# Altium PCB Glucometro_v2_PCB.PcbDoc
Units mm, origin at the board's own origin, x right, y up, seen from the top; angles counter-clockwise.
Board outline 92.46 x 57.91 mm, 2 copper layers (Top Layer, Bottom Layer), stack 0.325 mm thick; 17 components, 11 nets, 54 pads, 11 vias.
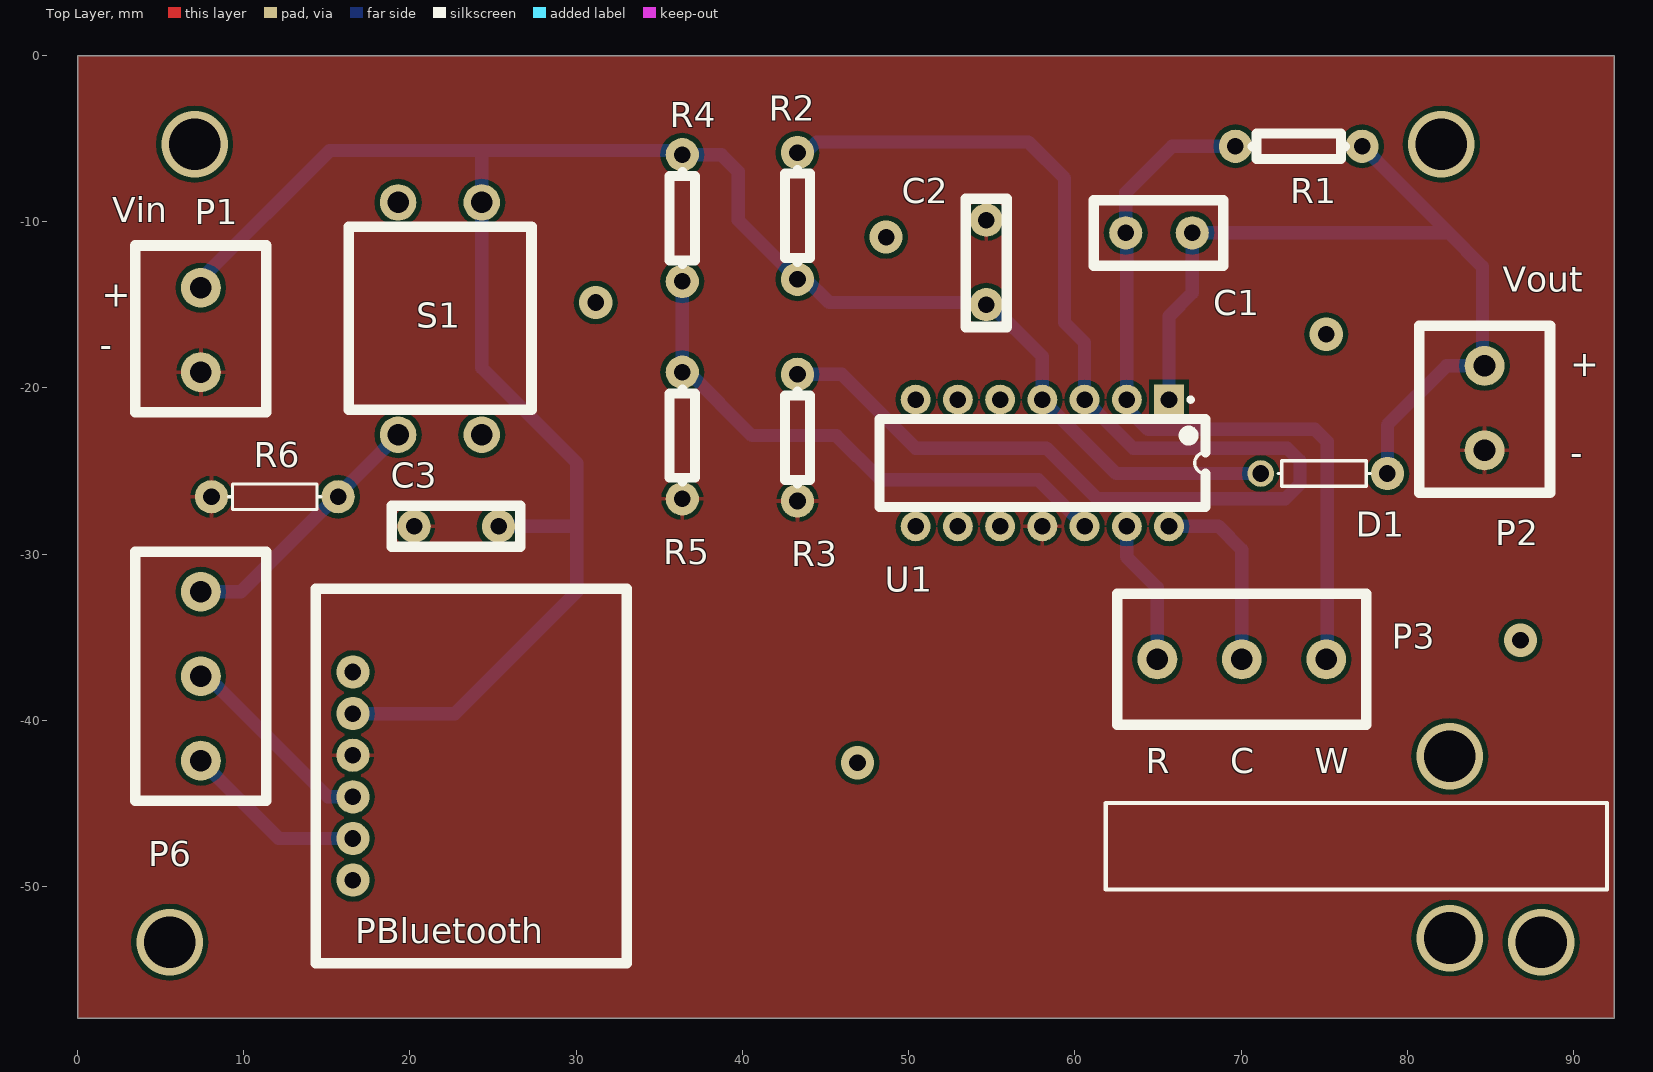
[diagram p0: Top Layer view]
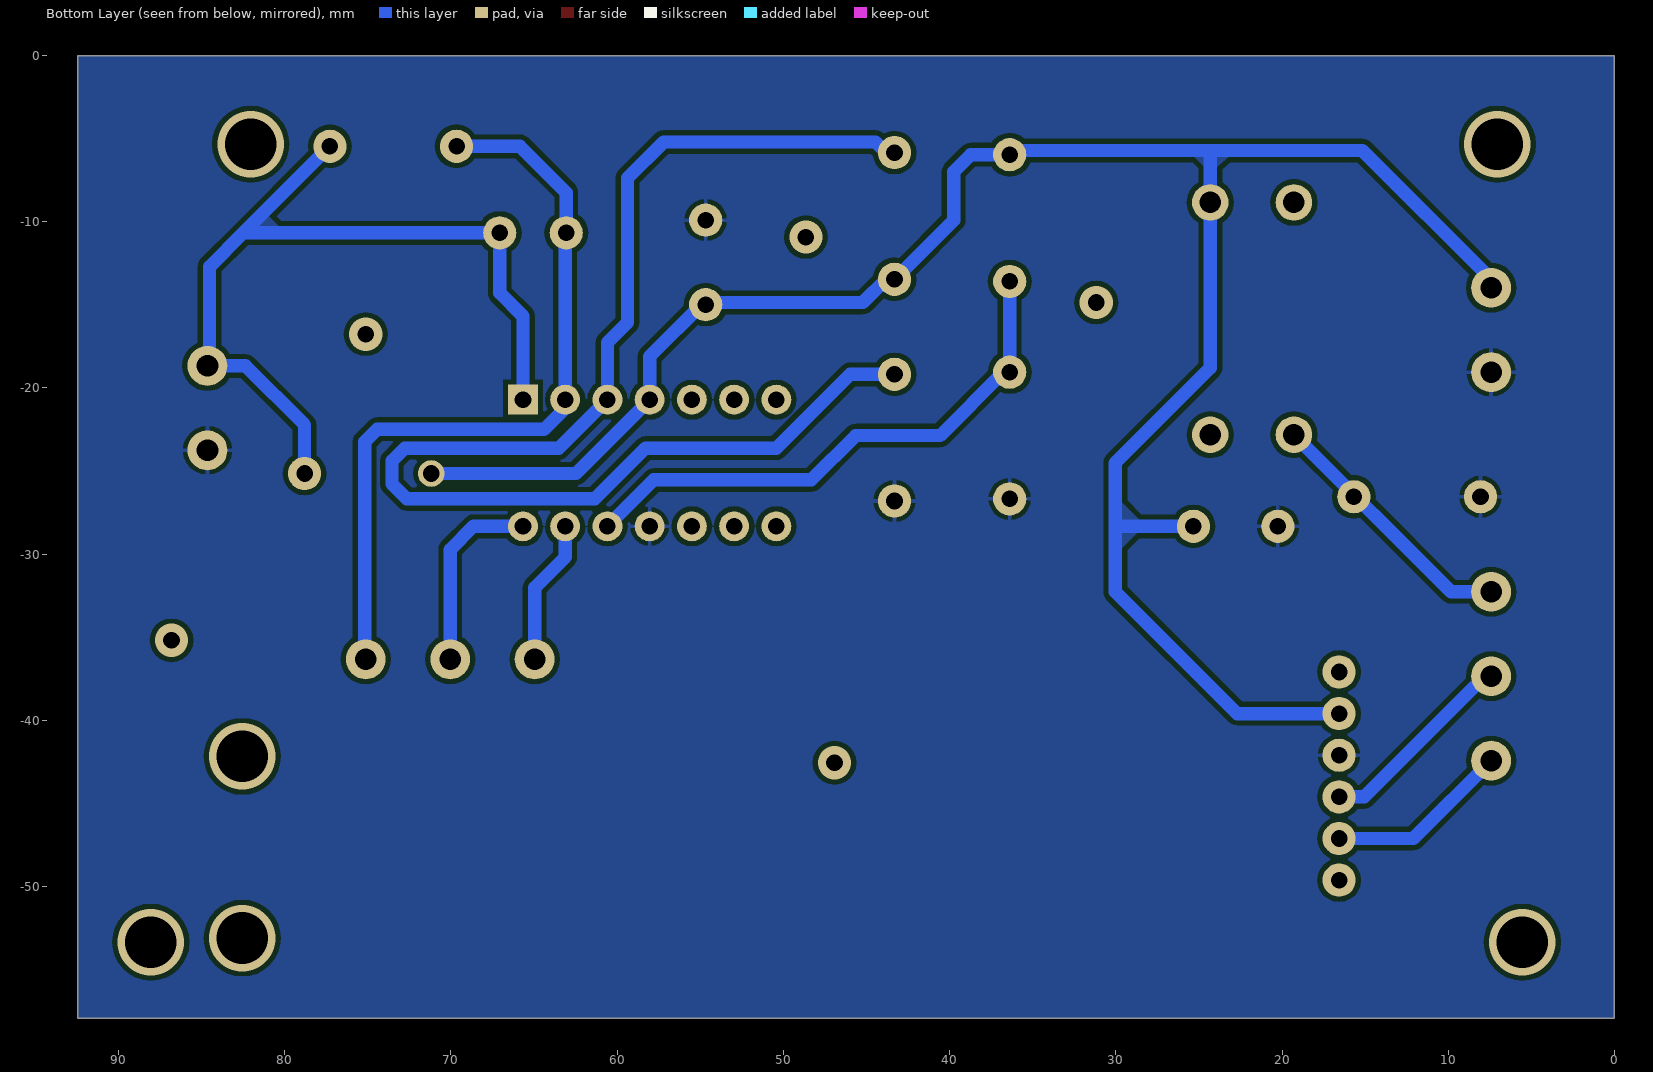
[diagram p1: Bottom Layer view, seen from below]

## Layer stack, top to bottom
Top Solder: solder mask 0.0102, Solder Resist, Dk 3.5
Top Layer: signal copper 0.0356
Dielectric 1: core 0.254, FR-4, Dk 4.2
Bottom Layer: signal copper 0.0356
Bottom Solder: solder mask 0.0102, Solder Resist, Dk 3.5

## Board outline
0,0 92.456,0 92.456,-57.912 0,-57.912

## Design rules (kind name [scope] priority, off if disabled: settings)
Clearance [All] p1: gap=0.3 ignorepadtopadclearanceinfootprint=FALSE
HoleSize [All] p1: absolutevalues=TRUE maxlimit=5 minlimit=0.025 maxpercent=80.000 minpercent=20.000
PlaneConnect [InNet('GND')] p1: pad.planeconnectstyle=Relief pad.reliefexpansion=0.3 pad.reliefentries=4 pad.reliefconductorwidth=0.3 pad.reliefairgap=0.3 via.planeconnectstyle=Direct via.reliefexpansion=0.508 via.reliefentries=4 via.reliefconductorwidth=0.254 via.reliefairgap=0.254
PolygonConnect [All] p1: connectstyle=Relief reliefconductorwidth=0.254 reliefentries=4 polygonreliefangle="90 Angle" airgapwidth=0.254
RoutingVias [All] p1: holewidth=0.711 width=1.27 viastyle="Through Hole" minholewidth=0.711 minwidth=1.27 maxholewidth=0.711 maxwidth=1.27
SilkToSilkClearance [All] p1: silktosilkclearance=0
SilkToSolderMaskClearance [IsPad] p1: minsilkscreentomaskgap=0 clearancetoexposedcopper=TRUE
SolderMaskExpansion [All] p1: expansion=0.102
Width [All] p1: maxlimit=0.9 minlimit=0.7 preferedwidth=0.8
26 further rules are at their usual default settings.

## Components (designator, comment, footprint, x,y, rotation, side; value= is the part's Value field where it differs from the comment)
C1 "Cap Modified" CAP_EDITED 63.056,-10.668 r0 top value=100nF
C2 "Cap" CAP_ALIM_EDITED 54.667,-9.906 r270 top value=100pF
C3 "Cap" CAP_ALIM_EDITED 25.33,-28.321 r180 top value=100pF
D1 "Diode" AXIAL-0.3#1 74.987,-25.146 r180 top
P1 "Header 2 Modified" Header2_edited 7.423,-19.05 r90 top
P2 "Header 2 Modified" Header2_edited 84.639,-18.669 r270 top
P3 "Header 3 Modified" HEADER3_EDITED 64.954,-36.322 r0 top
P6 "Header 3 Modified" HEADER3_EDITED 7.423,-32.258 r270 top
PBluetooth "Header 6" HEADERBLUETOOTH 16.567,-37.084 r270 top
R1 "Res1" AXIAL-0.3#2 73.463,-5.461 r0 top value=290K
R2 "Res1" AXIAL-0.3#2 43.307,-9.652 r270 top value=3.9K
R3 "Res1" AXIAL-0.3#2 43.307,-22.987 r90 top value=10K
R4 "Res1" AXIAL-0.3#2 36.379,-9.779 r90 top value=100K
R5 "Res1" AXIAL-0.3#2 36.379,-22.86 r90 top value=14.7K
R6 "Res1" AXIAL-0.3#2 11.868,-26.543 r0 top value=330
S1 "SW-PB" BUTTON 27.362,-10.287 r180 top
U1 "LT1014CN" LT-N-14 58.039,-24.511 r270 top

## Footprints (in the part's own frame and the unit in brackets; to place one, negate y for a bottom-side part, rotate by r counter-clockwise, add the part's x,y. Pads: shape width x height; smd on the part's side, far side on the other; paste and mask are expansions set on the pad)
AXIAL-0.3#1 [mm] "Axial Device, Thru-Hole; 2 Leads; 0.3 in Pin Spacing"
  round 2 hole 1: 1(-3.81,0)
  round 1.6 hole 1: 2(3.81,0)
  silkscreen extent -2.77,-0.76 2.77,0.76
AXIAL-0.3#2 [mm] "Axial Device, Thru-Hole; 2 Leads; 0.3 in Pin Spacing"
  round 2 hole 1: 1(-3.81,0) 2(3.81,0)
  silkscreen extent -2.77,-0.76 2.77,0.76
BUTTON [mm]
  round 2.2 hole 1.3: 1(3.048,12.522) 2(8.077,12.522) 3(3.048,-1.448) 4(8.077,-1.448)
  silkscreen extent 0.05,0.03 11.05,11.03
CAP_ALIM_EDITED [mm]
  round 2 hole 1: 1(0,0) 2(5.08,0)
  silkscreen extent -1.3,-1.24 6.43,1.22
CAP_EDITED [mm]
  round 2 hole 1: 1(0,0) 2(4,0)
  silkscreen extent -1.93,-1.98 5.87,1.96
Header2_edited [mm]
  round 2.4 hole 1.3: 1(0,0) 2(5.08,0)
  silkscreen extent -2.41,-3.94 7.62,3.94
HEADER3_EDITED [mm]
  round 2.4 hole 1.3: 1(0,0) 2(5.08,0) 3(10.16,0)
  silkscreen extent -2.41,-3.94 12.57,3.94
HEADERBLUETOOTH [mm]
  round 2 hole 1: 1(0,0) 2(2.504,0) 3(5.008,0) 4(7.512,0) 5(10.016,0) 6(12.52,0)
  silkscreen extent -5,-2.24 17.52,16.48
LT-N-14 [mm] "DIP, 14-Leads, Body 19.558x6.477mm, Pitch 2.54mm"
  rect 1.8x1.8 hole 1: 1(-3.81,7.62)
  round 1.8 hole 1: 2(-3.81,5.08) 3(-3.81,2.54) 4(-3.81,0) 5(-3.81,-2.54) 6(-3.81,-5.08) 7(-3.81,-7.62) 8(3.81,-7.62) 9(3.81,-5.08) 10(3.81,-2.54) 11(3.81,0) 12(3.81,2.54) 13(3.81,5.08) 14(3.81,7.62)
  silkscreen extent -3.93,-9.8 2.65,9.8, body extent -3.95,-9.77 3.95,9.77, height 3.94

## Part data
C1: library part Cap, "Capacitor", LatestRevisionDate=17-Jul-2002, LatestRevisionNote="Re-released for DXP Platform.", PackageDescription="Radial Cap, Thru-Hole; 2 Leads; 0.3 in Pin Spacing", PackageReference=RAD-0.3, Published=8-Jun-2000, Publisher="Altium Limited"
C2 C3: "Capacitor", LatestRevisionDate=17-Jul-2002, LatestRevisionNote="Re-released for DXP Platform.", PackageDescription="Radial Cap, Thru-Hole; 2 Leads; 0.3 in Pin Spacing", PackageReference=RAD-0.3, Published=8-Jun-2000, Publisher="Altium Limited"
D1: library part Res1, "Resistor", LatestRevisionDate=17-Jul-2002, LatestRevisionNote="Re-released for DXP Platform.", PackageDescription="Axial Device, Thru-Hole; 2 Leads; 0.3 in Pin Spacing", PackageReference=AXIAL-0.3, Published=8-Jun-2000, Publisher="Altium Limited"
P1 P2: library part "Header 2", "Header, 2-Pin", LatestRevisionDate=17-Jul-2002, LatestRevisionNote="Re-released for DXP Platform.", Publisher="Altium Limited"
P3 P6: library part "Header 3", "Header, 3-Pin", LatestRevisionDate=17-Jul-2002, LatestRevisionNote="Re-released for DXP Platform.", Publisher="Altium Limited"
PBluetooth: "Header, 6-Pin", LatestRevisionDate=17-Jul-2002, LatestRevisionNote="Re-released for DXP Platform.", Publisher="Altium Limited"
R1 R2 R3 R4 R5 R6: "Resistor", LatestRevisionDate=17-Jul-2002, LatestRevisionNote="Re-released for DXP Platform.", PackageDescription="Axial Device, Thru-Hole; 2 Leads; 0.3 in Pin Spacing", PackageReference=AXIAL-0.3, Published=8-Jun-2000, Publisher="Altium Limited"
S1: library part Button, "Switch", LatestRevisionDate=17-Jul-2002, LatestRevisionNote="Re-released for DXP Platform.", PackageDescription="Switch; 2 Leads", PackageReference=SPST-2, Published=24-Mar-1999, Publisher="Altium Limited"
U1: "Quad Channel, Precision Single Supply Operational Amplifier, 0.8 MHz Typical GBW, 0.4 V/us Typical SR, 4 to 44 V, 14-Pin DIP (N-14), Commerical", Linear Technology Part Number=LT1014, Manufacturer="Linear Technology", Supplier Part Number 1=LT1014CNLT-ND, Channels (#)=4, ComponentLink1Description="Manufacturer URL", ComponentLink1URL=http://www.linear.com/, ComponentLink2Description=Datasheet, ComponentLink2URL=http://cds.linear.com/docs/en/datasheet/10134fd.pdf, ComponentLink3Description="Package Specification", ComponentLink3URL=http://cds.linear.com/docs/en/packaging/05081510_I_N14.pdf, DatasheetVersion="Rev. D", GBW (MHz) Typical=0.8, Is (mA) Typical=0.35, Mounting Technology="Through Hole", PackageDescription="14-Lead PDIP, Body 19.558 x 6.477 mm, Pitch 2.54 mm", PackageReference=LT-N-14, PackageVersion="Rev I", PartNumber=LT1014CN, SR (V/us) Typical=0.4, Supplier 1=Digi-Key, Supplier 2=Newark, Supplier Part Number 2=57M0838, Type=VFB, Vos (mV) Typical=0.04, Vs Max (V)=44, Vs Min (V)=4

## Via types
v1: diameter 4, hole 3.1, Top Layer to Bottom Layer, 6 vias
v2: diameter 2, hole 1, Top Layer to Bottom Layer, 5 vias

## Nets (pads, with @x,y where several pads share a name; then routed paths per layer and width w, separated by ;. In a path a pad name is that pad's centre, name@x,y a point inside that pad or via, vN(x,y) a via of type N, cw(c..) or ccw(c..) an arc to the next point about the centre after c; other vN are vias at no path point)
0.6V: R4.1 R5.2 U1.12 | length 33.5
  Bottom Layer w0.8: R4.1 R5.2 36.76,-19.05 40.57,-22.86 45.65,-22.86 48.317,-25.527 57.785,-25.527 U1.12
1V: R2.1 R3.2 U1.3 | length 80.1
  Bottom Layer w0.8: R3.2 45.974,-19.177 50.419,-23.622 58.293,-23.622 61.341,-26.67 72.644,-26.67 73.533,-25.781 73.533,-24.384 72.771,-23.622 63.5,-23.622 U1.3 60.579,-17.272 59.366,-16.059 59.366,-7.366 57.207,-5.207 44.45,-5.207 R2.1@43.815,-5.842
5V: C2.2 C3.1 D1.2 P1.2 PBluetooth.2 R2.2 R4.2 S1.3 U1.4 | length 128.9
  Bottom Layer w0.8: P1.2 7.423,-13.462 15.17,-5.715 24.257,-5.715 ; PBluetooth.2 22.699,-39.588 30.029,-32.258 30.029,-28.321 ; C3.1 30.029,-28.321 ; D1.2 62.484,-25.146 U1.4 58.039,-18.104 54.794,-14.859 45.212,-14.859 43.815,-13.462 R2.2 39.751,-9.906 39.751,-6.985 38.735,-5.969 R4.2 36.125,-5.715 24.257,-5.715 ; 24.257,-5.715 24.314,-5.772 S1.3 24.314,-18.796 30.029,-24.511 30.029,-28.321
GND: C2.1 C3.2 P1.1 P2.2 PBluetooth.3 R3.1 R5.1 R6.1 U1.11
NetC1_1: C1.1 P3.3 R1.1 U1.2 | length 46.3
  Bottom Layer w0.8: C1.1 63.056,-8.248 65.843,-5.461 R1.1 ; U1.2@63.119,-21.209 64.389,-22.479 74.422,-22.479 75.184,-23.241 P3.3@75.184,-36.449 ; U1.2 C1.1@63.119,-10.643
NetC1_2: C1.2 D1.1 P2.1 R1.2 U1.1 | length 52
  Bottom Layer w0.8: U1.1 65.659,-15.678 67.056,-14.281 C1.2 82.48,-10.668 ; R1.2 82.48,-10.668 ; D1.1 78.797,-22.225 82.353,-18.669 P2.1 ; P2.1@84.512,-18.161 84.512,-12.7 82.48,-10.668
NetP3_1: P3.1 U1.13 | length 8.8
  Bottom Layer w0.8: U1.13 63.119,-30.169 64.954,-32.004 P3.1
NetP3_2: P3.2 U1.14 | length 11.6
  Bottom Layer w0.8: U1.14 68.637,-28.321 70.034,-29.718 P3.2
NetP6_1: P6.1 R6.2 S1.2 | length 15.8
  Bottom Layer w0.8: P6.1 9.836,-32.258 S1.2
NetP6_2: P6.3 PBluetooth.5 | length 11.1
  Bottom Layer w0.8: P6.3 12.105,-47.1 PBluetooth.5
NetP6_3: P6.2 PBluetooth.4 | length 12.2
  Bottom Layer w0.8: P6.2 7.804,-37.338 15.062,-44.596 PBluetooth.4
pads on no net: PBluetooth.1 PBluetooth.6 S1.1 S1.4 U1.5 U1.6 U1.7 U1.8 U1.9 U1.10
copper on no net:
  other v1: 5.542,-53.334 88.042,-53.334 82.542,-53.086 82.542,-42.164 7.042,-5.334 82.042,-5.334
  other v2: 46.92,-42.545 86.798,-35.179 75.114,-16.764 31.172,-14.859 48.641,-10.922

## Polygon pours and split planes (outlines as drawn)
GND on Top Layer "GND_L01_P216" (solid, pour order 216): 0,0 92.456,0 92.456,-57.912 0,-57.912
GND on Top Layer "GND_L01_P200" (solid, pour order 200): 0,0
GND on Top Layer "GND_L01_P096" (solid, pour order 96): 20.701,1.143
GND on Top Layer "GND Plane" (solid, pour order 66): 20.828,0.762
GND on Top Layer "GND Plane" (solid, pour order 64): 20.701,1.143
GND on Top Layer "GND Plane" (solid, pour order 62): 20.574,1.143
GND on Top Layer "GND Plane" (solid, pour order 60): 20.701,1.143
NetC1_2 on Top Layer "NETC1_2_L01_P050" (solid, pour order 50): 77.343,-16.51
GND on Top Layer "GND Plane" (solid, pour order 44): 88.265,-45.085
GND on Top Layer "GND Plane" (solid, pour order 38): 21.209,1.143
GND on Top Layer "GND Plane" (solid, pour order 30): 10.414,-64.897
GND on Top Layer "GND Plane" (solid, pour order 28): 62.484,-48.133
GND on Top Layer "GND Plane" (solid, pour order 22): 76.835,-49.149
GND on Bottom Layer "GND_L02_P210" (solid, pour order 210): 0,0 92.456,0 92.456,-57.912 0,-57.912
5V on Bottom Layer "5V_L02_P208" (solid, pour order 208): 22.606,-5.588 25.781,-5.588 24.384,-6.985 24.257,-6.985
5V on Bottom Layer "5V_L02_P206" (solid, pour order 206): 22.225,-5.715
5V on Bottom Layer "5V_L02_P204" (solid, pour order 204): 29.972,-26.543 29.972,-29.972 28.321,-28.321 28.321,-28.194
5V on Bottom Layer "5V_L02_P192" (solid, pour order 192): 29.902,-29.718
NetC1_2 on Bottom Layer "NETC1_2_L02_P188" (solid, pour order 188): 82.226,-10.414 80.194,-10.414 81.21,-9.398
NetC1_2 on Bottom Layer "NETC1_2_L02_P132" (solid, pour order 132): 79.813,-10.414
NetC1_1 on Bottom Layer "NETC1_1_L02_P124" (solid, pour order 124): 74.479,-10.414
NetC1_1 on Bottom Layer "NETC1_1_L02_P122" (solid, pour order 122): 72.32,-10.414
NetC1_1 on Bottom Layer "NETC1_1_L02_P114" (solid, pour order 114): 76.13,-9.398
NetC1_2 on Bottom Layer "NETC1_2_L02_P106" (solid, pour order 106): 83.566,-6.604
NetC1_2 on Bottom Layer "NETC1_2_L02_P102" (solid, pour order 102): 83.566,-6.604
NetC1_2 on Bottom Layer "NETC1_2_L02_P098" (solid, pour order 98): 83.566,-8.001
GND on Bottom Layer "GND_L02_P056" (solid, pour order 56): 24.765,-0.762

## Silkscreen, mask and mechanical layers (free items; w line width, h text height)
Top Overlay:
  lines w0.254: 61.849,-50.165 61.849,-44.958 92.005,-44.958 92.005,-50.165 61.849,-50.165
  text "Vin" at 2.089,-10.033 h1.52
  text "Vout" at 85.725,-14.224 h1.52
  text "+" at 1.454,-15.113 h1.52
  text "-" at 1.327,-18.161 h1.52
  text "+" at 89.789,-19.304 h1.52
  text "-" at 89.789,-24.638 h1.52
  text "R" at 64.262,-43.18 h1.52
  text "C" at 69.342,-43.18 h1.52
  text "W" at 74.422,-43.18 h1.52
Mechanical 1:
  the board outline again, w0.8